# Altium PCB Layout.PcbDoc
Units mil, origin at the board's own origin, x right, y up, seen from the top; angles counter-clockwise.
Board outline 708.66 x 968 mil, 4 copper layers (Top Layer, Signal 1, Signal 2, Bottom Layer), stack 61.2 mil thick; 60 components, 41 nets, 144 pads, 96 vias.
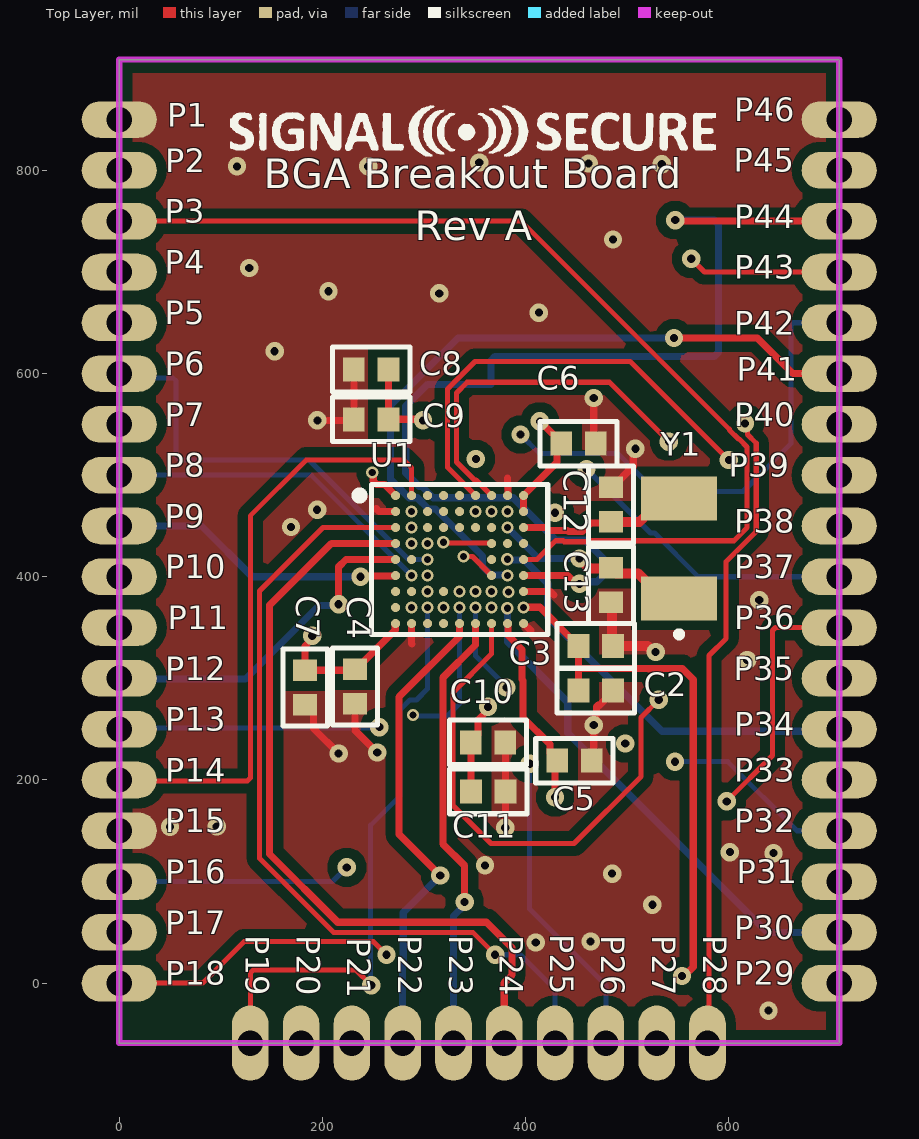
[diagram p0: Top Layer view]
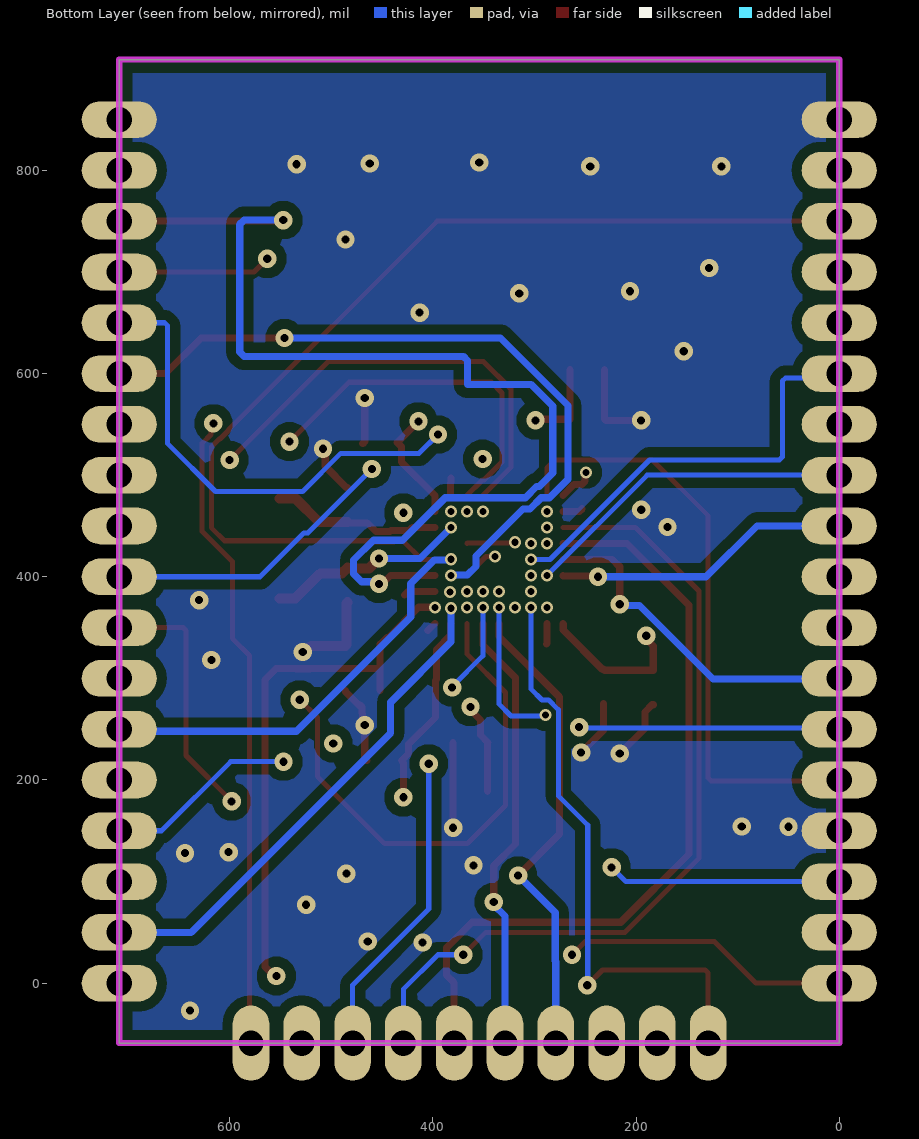
[diagram p1: Bottom Layer view, seen from below]
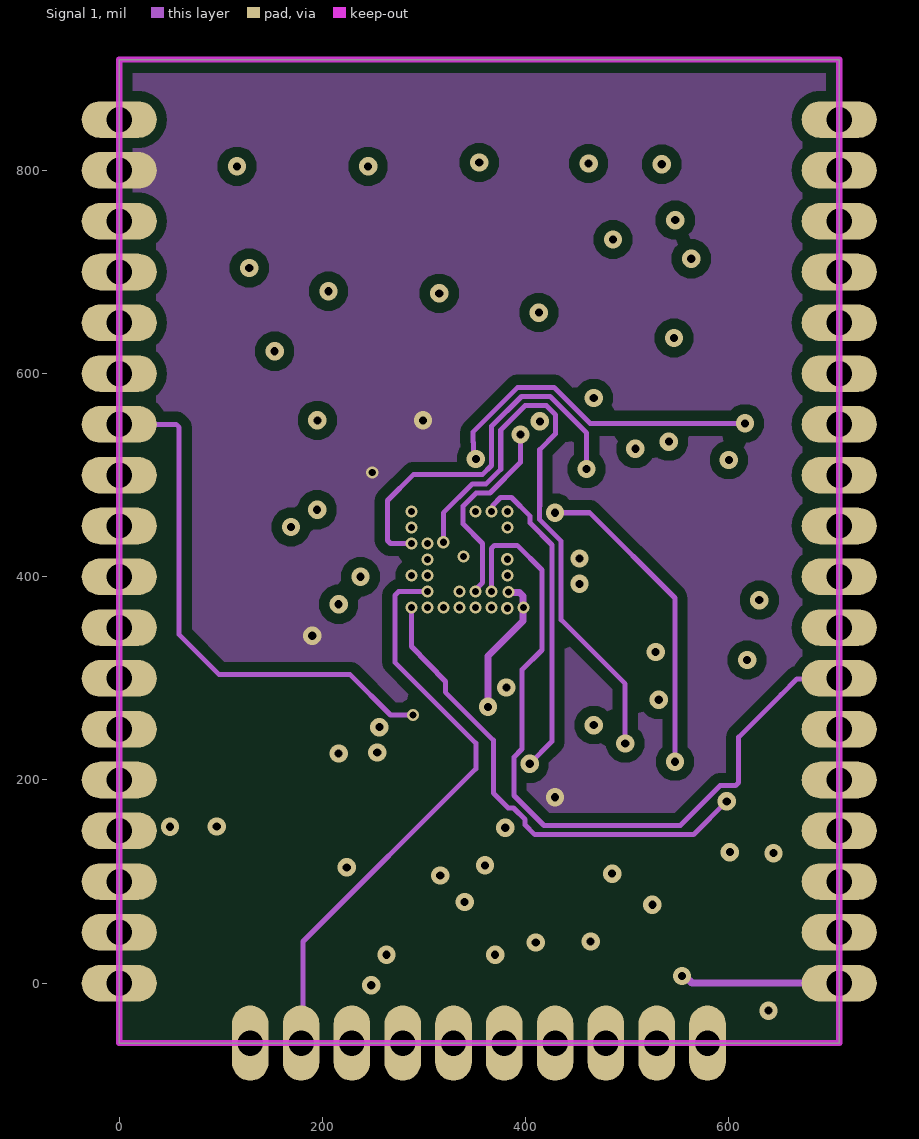
[diagram p2: Signal 1]
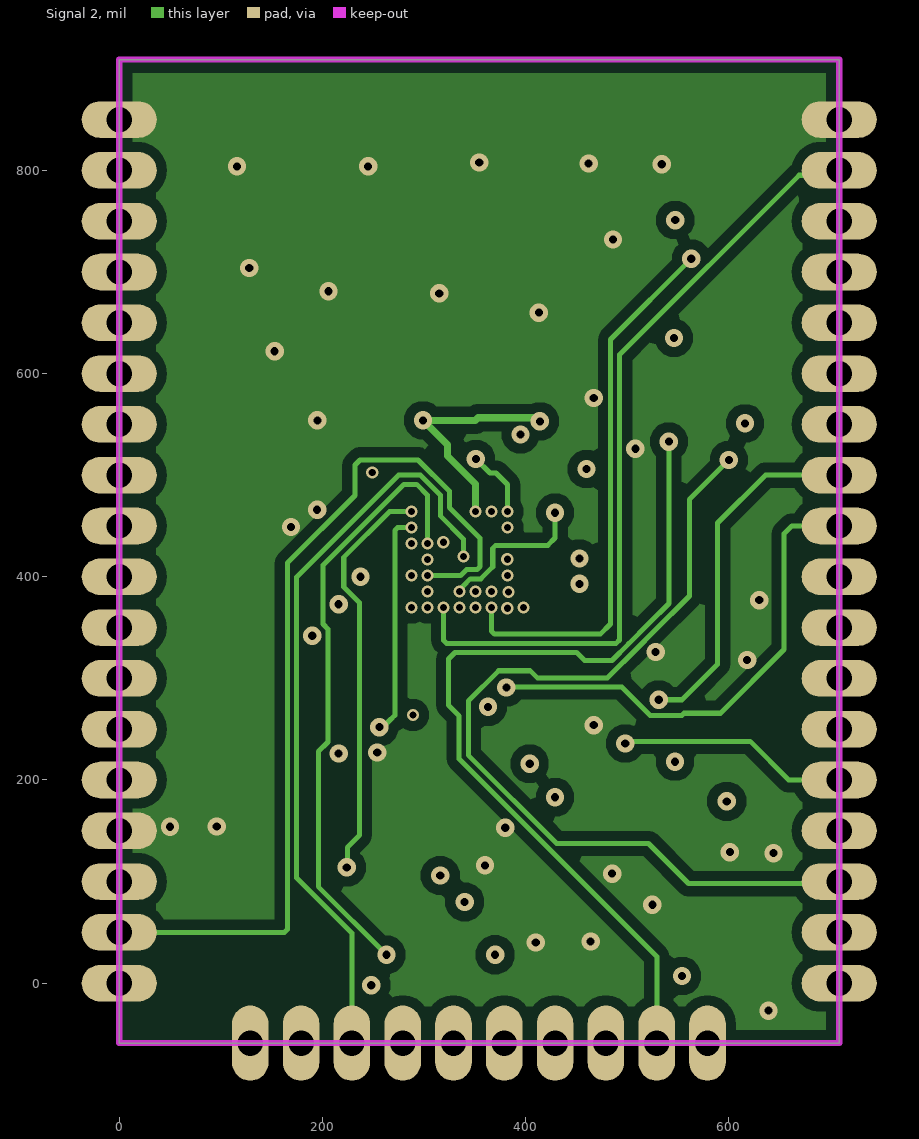
[diagram p3: Signal 2]

## Layer stack, top to bottom
Top Solder: solder mask 0.4, Solder Resist, Dk 3.5
Top Layer: signal copper 1.4
Dielectric 1: prepreg 2.8, PP-006, Dk 4.1
Signal 1: signal copper 1.4
Dielectric1: core 50, Core-044, Dk 4.28
Signal 2: signal copper 1.4
Dielectric 2: prepreg 2.8, PP-006, Dk 4.1
Bottom Layer: signal copper 1.4
Bottom Solder: solder mask 0.4, Solder Resist, Dk 3.5

## Board outline
0,-59 708.66,-59 708.66,909 0,909

## Design rules (kind name [scope] priority, off if disabled: settings)
AcuteAngle [All] p1 off: minimum=6.00000000000000E+0001 checktracksonly=FALSE
AssemblyTestPointUsage [All] p1 off:
AssemblyTestpoint [All] p1 off: testpointundercomponent=TRUE minsize=40 maxsize=100 preferedsize=60 minholesize=0 maxholesize=40 preferedholesize=32 testpointgrid=1 usegrid=TRUE gridtolerance=0.01 allowsidetop=TRUE allowsidebottom=TRUE
Clearance Clearance_Keepout [OnLayer('Keep-Out Layer')] p1: gap=4 ignorepadtopadclearanceinfootprint=FALSE except(0: Track-Track Track-SMDPad Track-THPad Track-Hole; 2: Via-Via; 10: Arc-Poly Arc-Region Track-Poly Track-Region SMDPad-Poly SMDPad-Region THPad-Poly THPad-Region Via-Poly Via-Region Fill-Poly Fill-Region Poly-Poly Poly-Region Poly-Text Poly-Hole Region-Region)
Clearance [All] p2: gap=4 ignorepadtopadclearanceinfootprint=FALSE except(3: Track-Fill; 3.5: THPad-Via Via-Via; 10: Arc-Poly Track-Poly SMDPad-Poly THPad-Poly Via-Poly Fill-Poly Poly-Poly Poly-Text Poly-Hole)
ComponentClearance [All] p1: gap=1 collisioncheckmode=3 verticalgap=10 showdistances=FALSE
DiffPairsRouting [All] p1: maxlimit=5 minlimit=5 mostfreqgap=5 toplayer_minwidth=15 toplayer_maxwidth=18.74 toplayer_prefwidth=15 midlayer1_minwidth=15 midlayer1_maxwidth=15 midlayer1_prefwidth=15 midlayer2_minwidth=15 midlayer2_maxwidth=15 midlayer2_prefwidth=15 bottomlayer_minwidth=15 bottomlayer_maxwidth=18.74 bottomlayer_prefwidth=15 maxuncoupledlength=100
FabricationTestPointUsage [All] p1 off: valid=0 allowmultiple=FALSE
FabricationTestPointUsage TestPointUsage [All] p2 off: valid=0 allowmultiple=FALSE
FabricationTestpoint [All] p1 off: side=3 testpointundercomponent=TRUE minsize=40 maxsize=100 preferedsize=60 minholesize=0 maxholesize=40 preferedholesize=32 testpointgrid=1 allowsidetop=TRUE allowsidebottom=TRUE usegrid=TRUE gridtolerance=0.01
FabricationTestpoint Testpoint [All] p2 off: side=3 testpointundercomponent=TRUE minsize=40 maxsize=100 preferedsize=60 minholesize=0 maxholesize=40 preferedholesize=32 testpointgrid=1 allowsidetop=TRUE allowsidebottom=TRUE usegrid=TRUE gridtolerance=0.01
FanoutControl Fanout_LCC [IsLCC] p1 off: bgadir=Out bgaviamode=Centered fanoutstyle=Auto fanoutdirection=Alternating viagrid=1 // Fanout_LCC (Default Rule)
FanoutControl Fanout_BGA [IsBGA] p2 off: bgadir=Out bgaviamode=Centered fanoutstyle=Auto fanoutdirection=Alternating viagrid=1 // Fanout_BGA (Default Rule)
FanoutControl Fanout_Small [(CompPinCount < 5)] p3 off: bgadir=Out bgaviamode=Centered fanoutstyle=Auto fanoutdirection=OutThenIn viagrid=1 // Fanout_Small (Default Rule)
FanoutControl Fanout_SOIC [IsSOIC] p4 off: bgadir=Out bgaviamode=Centered fanoutstyle=Auto fanoutdirection=Alternating viagrid=1 // Fanout_SOIC (Default Rule)
FanoutControl Fanout_Default [All] p5 off: bgadir=Out bgaviamode=Centered fanoutstyle=Auto fanoutdirection=Alternating viagrid=1 // Fanout_Default (Default Rule)
FanoutControl Fanout_BGA_1 [IsBGA] p6 off: bgadir=Out bgaviamode=Centered fanoutstyle=Auto fanoutdirection=Alternating viagrid=1 // Fanout_BGA (Default Rule)
FanoutControl Fanout_LCC_1 [IsLCC] p7 off: bgadir=Out bgaviamode=Centered fanoutstyle=Auto fanoutdirection=Alternating viagrid=1 // Fanout_LCC (Default Rule)
FanoutControl Fanout_SOIC_1 [IsSOIC] p8 off: bgadir=Out bgaviamode=Centered fanoutstyle=Auto fanoutdirection=Alternating viagrid=1 // Fanout_SOIC (Default Rule)
FanoutControl Fanout_Small_1 [(CompPinCount < 5)] p9 off: bgadir=Out bgaviamode=Centered fanoutstyle=Auto fanoutdirection=OutThenIn viagrid=1 // Fanout_Small (Default Rule)
FanoutControl Fanout_Default_1 [All] p10 off: bgadir=Out bgaviamode=Centered fanoutstyle=Auto fanoutdirection=Alternating viagrid=1 // Fanout_Default (Default Rule)
Height [OnLayer('Top Layer')] p1: minheight=0 maxheight=1000 prefheight=250
HoleSize [All] p1: absolutevalues=TRUE maxlimit=500 minlimit=7 maxpercent=80.000 minpercent=20.000
HoleToHoleClearance [All] p1: gap=5 allowstackedmicrovias=TRUE
LayerPairs [All] p1 off: enforce=TRUE
LayerPairs LayerPairs_1 [All] p2 off: enforce=TRUE
MinimumAnnularRing [All] p1: minimumring=2
MinimumSolderMaskSliver [All] p1 off: minsoldermaskwidth=4
NetAntennae [All] p1: netantennaetolerance=10
NetsToIgnore [InNetClass('PWR') or InNetClass('20MIL') or InNetClass('50MIL') or InNetClass('BDCOMDIFF-10W5G') or InNetClass('DIFF-5W5G') or InNetClass('DIFF-7.5W5G') or InNetClass('FE-CTRL-5W7SP') or InNetClass('FE-INPUT') or InNetClass('FRONTEND') or InNetClass('GND') or InNetClass('mem-add') or InNetClass('mem-data')] p1 off:
PlaneClearance [All] p1: clearance=10
PlaneConnect PlaneVia [IsVia] p1: planeconnectstyle=Direct reliefexpansion=20 reliefentries=4 reliefconductorwidth=10 reliefairgap=10
PlaneConnect [All] p2: planeconnectstyle=Direct reliefexpansion=8 reliefentries=4 reliefconductorwidth=15 reliefairgap=8
PolygonConnect PolygonConnect_VIA [IsVia] p1: connectstyle=Direct reliefconductorwidth=10 reliefentries=4 polygonreliefangle="90 Angle" airgapwidth=10
PolygonConnect [All] p2: connectstyle=Direct reliefconductorwidth=15 reliefentries=4 polygonreliefangle="90 Angle" airgapwidth=10
RoutingPriority [All] p1 off: routingpriority=0
RoutingTopology RoutingTopology_ADD [InNetClass('mem-add')] p1: topology=Shortest
RoutingTopology RoutingTopology_Data [InNetClass('mem-data')] p2: topology=Shortest
RoutingTopology [All] p3: topology=Shortest
RoutingVias [All] p1: holewidth=8 width=18 viastyle="Through Hole" minholewidth=7 minwidth=7 maxholewidth=30 maxwidth=50
SilkToSilkClearance [All] p1 off: silktosilkclearance=10
SilkToSolderMaskClearance SilkscreenOverComponentPads [IsPad] p1 off: minsilkscreentomaskgap=10 clearancetoexposedcopper=TRUE
SolderMaskExpansion [All] p1: expansion=3 istentingtop=FALSE
Width [All] p1: maxlimit=250 minlimit=5 preferedwidth=10 minimp=50.000000 maximp=50.000000 favimp=50.000000
7 further rules are at their usual default settings.

## Components (designator, comment, footprint, x,y, rotation, side; value= is the part's Value field where it differs from the comment)
C2 "GRM155R71H104KE14J" CAP_0402_0.55MM 469,289 r180 top value=0.1uF
C3 "GRM155R61E105MA12D" CAP_0402_0.55MM 469,331 r0 top value=1uF
C4 "GRM155R71H104KE14J" CAP_0402_0.55MM 233,291.99 r90 top value=0.1uF
C5 "GRM155R71H104KE14J" CAP_0402_0.55MM 448,220 r180 top value=0.1uF
C6 "GRM155R71H104KE14J" CAP_0402_0.55MM 452,532 r180 top value=0.1uF
C7 "CL05A475KP5NRNC" CAP_0402_0.55MM 182,291 r270 top value=4.7uF
C8 "GRM155R71H104KE14J" CAP_0402_0.55MM 248,603 r0 top value=0.1uF
C9 "CL05A475KP5NRNC" CAP_0402_0.55MM 248,556 r180 top value=4.7uF
C10 "GCM155R71H103KA55J" CAP_0402_0.55MM 363,236 r0 top value=10nF
C11 "GRM155R61E105MA12D" CAP_0402_0.55MM 363.23,187.78 r0 top value=1uF
C12 "885012005023" CAP_0402_0.55MM 485,471.01 r90 top value=4.7pF
C13 "885012005023" CAP_0402_0.55MM 483,391.99 r270 top value=4.7pF
P1 "1-PIN-HDR-GEN" 1X01-PIN 0,850 r180 top
P2 "1-PIN-HDR-GEN" 1X01-PIN 0,800 r180 top
P3 "1-PIN-HDR-GEN" 1X01-PIN 0,750 r180 top
P4 "1-PIN-HDR-GEN" 1X01-PIN 0,700 r180 top
P5 "1-PIN-HDR-GEN" 1X01-PIN 0,650 r180 top
P6 "1-PIN-HDR-GEN" 1X01-PIN 0,600 r180 top
P7 "1-PIN-HDR-GEN" 1X01-PIN 0,550 r180 top
P8 "1-PIN-HDR-GEN" 1X01-PIN 0,500 r180 top
P9 "1-PIN-HDR-GEN" 1X01-PIN 0,450 r180 top
P10 "1-PIN-HDR-GEN" 1X01-PIN 0,400 r180 top
P11 "1-PIN-HDR-GEN" 1X01-PIN 0,350 r180 top
P12 "1-PIN-HDR-GEN" 1X01-PIN 0,300 r180 top
P13 "1-PIN-HDR-GEN" 1X01-PIN 0,250 r180 top
P14 "1-PIN-HDR-GEN" 1X01-PIN 0,200 r180 top
P15 "1-PIN-HDR-GEN" 1X01-PIN 0,150 r180 top
P16 "1-PIN-HDR-GEN" 1X01-PIN 0,100 r180 top
P17 "1-PIN-HDR-GEN" 1X01-PIN 0,50 r180 top
P18 "1-PIN-HDR-GEN" 1X01-PIN 0,0 r180 top
P19 "1-PIN-HDR-GEN" 1X01-PIN 129,-59 r90 top
P20 "1-PIN-HDR-GEN" 1X01-PIN 179,-59 r90 top
P21 "1-PIN-HDR-GEN" 1X01-PIN 229,-59 r90 top
P22 "1-PIN-HDR-GEN" 1X01-PIN 279,-59 r90 top
P23 "1-PIN-HDR-GEN" 1X01-PIN 329,-59 r90 top
P24 "1-PIN-HDR-GEN" 1X01-PIN 379,-59 r90 top
P25 "1-PIN-HDR-GEN" 1X01-PIN 429,-59 r90 top
P26 "1-PIN-HDR-GEN" 1X01-PIN 479,-59 r90 top
P27 "1-PIN-HDR-GEN" 1X01-PIN 529,-59 r90 top
P28 "1-PIN-HDR-GEN" 1X01-PIN 579,-59 r90 top
P29 "1-PIN-HDR-GEN" 1X01-PIN 708.66,0 r180 top
P30 "1-PIN-HDR-GEN" 1X01-PIN 708.66,50 r180 top
P31 "1-PIN-HDR-GEN" 1X01-PIN 708.66,100 r180 top
P32 "1-PIN-HDR-GEN" 1X01-PIN 708.66,150 r180 top
P33 "1-PIN-HDR-GEN" 1X01-PIN 708.66,200 r180 top
P34 "1-PIN-HDR-GEN" 1X01-PIN 708.66,250 r180 top
P35 "1-PIN-HDR-GEN" 1X01-PIN 708.66,300 r180 top
P36 "1-PIN-HDR-GEN" 1X01-PIN 708.66,350 r180 top
P37 "1-PIN-HDR-GEN" 1X01-PIN 708.66,400 r180 top
P38 "1-PIN-HDR-GEN" 1X01-PIN 708.66,450 r180 top
P39 "1-PIN-HDR-GEN" 1X01-PIN 708.66,500 r180 top
P40 "1-PIN-HDR-GEN" 1X01-PIN 708.66,550 r180 top
P41 "1-PIN-HDR-GEN" 1X01-PIN 708.66,600 r180 top
P42 "1-PIN-HDR-GEN" 1X01-PIN 708.66,650 r180 top
P43 "1-PIN-HDR-GEN" 1X01-PIN 708.66,700 r180 top
P44 "1-PIN-HDR-GEN" 1X01-PIN 708.66,750 r180 top
P45 "1-PIN-HDR-GEN" 1X01-PIN 708.66,800 r180 top
P46 "1-PIN-HDR-GEN" 1X01-PIN 708.66,850 r180 top
U1 "STM32L476JGY6TR" BGA72C40P9X9_441X374X56 335,417 r0 top
Y1 "ECS-.327-6-34QN-TR" CRY_3.2X1.5_2SMD 551,428 r90 top value="32.768 kHz"

## Footprints (in the part's own frame and the unit in brackets; to place one, negate y for a bottom-side part, rotate by r counter-clockwise, add the part's x,y. Pads: shape width x height; smd on the part's side, far side on the other; paste and mask are expansions set on the pad)
1X01-PIN [mil]
  oval 74x36 hole 25: 1(0,0)
BGA72C40P9X9_441X374X56 [mm]
  round 0.225 smd mask+0: A1(-1.6,1.6) A2(-1.2,1.6) A3(-0.8,1.6) A4(-0.4,1.6) A5(0,1.6) A6(0.4,1.6) A7(0.8,1.6) A8(1.2,1.6) A9(1.6,1.6) B1(-1.6,1.2) B2(-1.2,1.2) B3(-0.8,1.2) B4(-0.4,1.2) B5(0,1.2) B6(0.4,1.2) B7(0.8,1.2) B8(1.2,1.2) B9(1.6,1.2) C1(-1.6,0.8) C2(-1.2,0.8) C3(-0.8,0.8) C4(-0.4,0.8) C5(0,0.8) C6(0.4,0.8) C7(0.8,0.8) C8(1.2,0.8) C9(1.6,0.8) D1(-1.6,0.4) D2(-1.2,0.4) D3(-0.8,0.4) D7(0.8,0.4) D8(1.2,0.4) D9(1.6,0.4) E1(-1.6,0) E2(-1.2,0) E3(-0.8,0) E7(0.8,0) E8(1.2,0) E9(1.6,0) F1(-1.6,-0.4) F2(-1.2,-0.4) F3(-0.8,-0.4) F7(0.8,-0.4) F8(1.2,-0.4) F9(1.6,-0.4) G1(-1.6,-0.8) G2(-1.2,-0.8) G3(-0.8,-0.8) G4(-0.4,-0.8) G5(0,-0.8) G6(0.4,-0.8) G7(0.8,-0.8) G8(1.2,-0.8) G9(1.6,-0.8) H1(-1.6,-1.2) H2(-1.2,-1.2) H3(-0.8,-1.2) H4(-0.4,-1.2) H5(0,-1.2) H6(0.4,-1.2) H7(0.8,-1.2) H8(1.2,-1.2) H9(1.6,-1.2) J1(-1.6,-1.6) J2(-1.2,-1.6) J3(-0.8,-1.6) J4(-0.4,-1.6) J5(0,-1.6) J6(0.4,-1.6) J7(0.8,-1.6) J8(1.2,-1.6) J9(1.6,-1.6)
  silkscreen extent -2.55,-1.88 2.2,1.88, body extent -2.2,-1.88 2.2,1.88, height 0.59
CAP_0402_0.55MM [mm]
  rect 0.54x0.6 smd: 1(-0.432,0.025) 2(0.432,0.025)
  silkscreen extent -0.97,-0.53 0.97,0.58, body extent -0.5,-0.25 0.5,0.3, height 0.5
CRY_3.2X1.5_2SMD [mm]
  rect 1.1x1.9 smd: 1(-1.25,0) 2(1.25,0)
  silkscreen extent -2.2,-0.05 -2.1,0.05, body extent -1.6,-0.75 1.6,0.75, height 0.9

## Part data
C2 C4 C5 C6 C8: library part CAP_0.1UF_50V_20%_0402, "CAP_0.1UF_50V_20%_0402", Manufacturer=Murata, Voltage Rating=50V, ComponentLink1Description=Datasheet, ComponentLink1URL=https://search.murata.co.jp/Ceramy/image/img/A01X/G101/ENG/GRM155R71E104ME14-01.pdf, Height=0.55MM, Manufacturer Part Number=GRM155R71H104KE14J
C3 C11: library part CAP_1UF_25V_20%_0402, "CAP_1UF_25V_20%_0402", Manufacturer=Murata, Package=0402, Voltage Rating=25V, Height=0.55MM, Manufacturer Part Number=GRM155R61E105MA12D
C7 C9: library part CAP_4.7UF_10V_X5R_0402, "CAP CER 4.7UF 10V X5R 0402", Manufacturer="Samsung Electro-Mechanics", Voltage Rating=10V, ComponentLink1Description=Datasheet, ComponentLink1URL=https://media.digikey.com/pdf/Data%20Sheets/Samsung%20PDFs/CL05A475KP5NRNC_Spec.pdf, Manufacturer Part Number=CL05A475KP5NRNC
C10: library part CAP_10NF_50V_10%_0402, "CAP_10NF_50V_10%_0402", Manufacturer=Murata, Package=0402, Voltage Rating=50V, ComponentLink1Description=Datasheet, ComponentLink1URL=https://search.murata.co.jp/Ceramy/image/img/A01X/G101/ENG/GCM155R71H103KA55-01.pdf, Height=0.55MM, Manufacturer Part Number=GCM155R71H103KA55J
C12 C13: library part CAP_4.7PF_16V_C0G_0402, "CAP_4.7PF_16V_C0G_0402", Manufacturer="Würth Elektronik", Voltage Rating=16V, ComponentLink1Description=Datasheet, ComponentLink1URL=https://www.we-online.com/katalog/datasheet/885012005023.pdf, Manufacturer Part Number=885012005023
P1 P2 P3 P4 P5 P6 P7 P8 P9 P10 P11 P12 P13 P14 P15 P16 P17 P18 P19 P20 P21 P22 P23 P24 P25 P26 P27 P28 P29 P30 P31 P32 P33 P34 P35 P36 P37 P38 P39 P40 P41 P42 P43 P44 P45 P46: "Generic through hole", Manufacturer=N/A, Manufacturer Part Number=DNP
U1: library part MCU_ARM_CM4_80MHZ_STM32L476JGY6TR, "ARM Microcontrollers - MCU Ultra-low-power FPU Arm Cortex-M4 MCU 80 MHz 1 Mbyte of Flash LCD, USB OTG, DFSD", Manufacturer=STMicroelectronics, ComponentLink1Description=Datasheet, ComponentLink1URL=https://www.st.com/content/ccc/resource/technical/document/datasheet/c5/ed/2f/60/aa/79/42/0b/DM00108832.pdf/files/DM00108832.pdf/jcr:content/translations/en.DM00108832.pdf, Manufacturer Part Number=STM32L476JGY6TR
Y1: library part CRY_32.768KHZ_70K_4PF_2SMD, "32.768 kHz ±20ppm Crystal 6pF 70 kOhms 2-SMD, No Lead", Manufacturer=ECS, ComponentLink1Description=Datasheet, ComponentLink1URL=https://www.mouser.de/ProductDetail/ECS/ECS-327-6-34QN-TR/?qs=%2FnKYMpMO73Pux8utSILL9w%3D%3D, Height=0.9mm, Manufacturer Part Number=ECS-.327-6-34QN-TR

## Via types
v1: diameter 18, hole 8, Top Layer to Bottom Layer, tented both sides, 66 vias
v2: diameter 12, hole 7, Top Layer to Bottom Layer, tented both sides, 30 vias

## Nets (pads, with @x,y where several pads share a name; then routed paths per layer and width w, separated by ;. In a path a pad name is that pad's centre, name@x,y a point inside that pad or via, vN(x,y) a via of type N, cw(c..) or ccw(c..) an arc to the next point about the centre after c; other vN are vias at no path point)
+3.3VDC: C4.2 C5.2 C6.2 C7.1 C8.2 C9.1 P2.1 U1.A1 U1.A9 U1.B6 U1.B9 U1.J1 U1.J8 | length 801.4
  Top Layer w7: v1(190,342) 190,339.02 183,332.02 C7.1 231.01,308.01 C4.2 233.18,309 271.65,347.47 271.65,353.65 U1.J1 ; v2(249.09,502.55) 250.05,501.6 250.05,494.15 253.19,491 261,491 U1.A1 ; C8.2 C9.1 298,555 v1(299,554) ; U1.J8 382.6,353.65 382.6,342.4 396.5,328.5 396.5,298.83 397.5,297.83 397.5,261.6 423.9,235.2 423.9,226.09 C5.2 429,217.01 v1(429,183) ; U1.B9 U1.A9 ; U1.A9@398.35,480.35 430.79,512.79 430.79,527.98 434.99,532.18 414.17,553 v1(414,553)
  Signal 2 w7: v1(299,554) v1@299.5,553.5 ; v2(350.75,464.24) 350.75,491.25 323.05,518.95 323.05,529.95 v1@299.5,553.5 ; v1(414,553) 411.02,553 407.52,556.5 353.16,556.5 350.66,554 300,554 v1@299.5,553.5
ANT_SW_V1: P19.1 U1.H3 | length 594.5
  Top Layer w5: P19.1 129,10.07 131.93,13 233,13 v1(248,-2)
  Bottom Layer w5: v1(248,-2) 247.5,-1.5 247.5,155.5 276.5,184.5 276.5,269.18 286,278.68 292.5,278.68 303.5,289.68 v2(303.5,369.76)
ANT_SW_V2: P20.1 U1.G3 | length 578.8
  Signal 1 w5: P20.1 180.93,-57.07 180.93,41 351,211.07 351,236.15 271.24,315.91 271.24,381.65 275.1,385.5 v2(303.5,385.5)
ANT_SW_V3: P21.1 U1.F7 | length 777.6
  Top Layer w5: v2(338.96,420.04) 347.7,420.04 U1.F7
  Signal 2 w5: P21.1 229,49.27 174.5,103.77 174.5,399.56 274.94,500 296.44,500 316.01,480.43 316.01,459.99 338.96,437.04 v2(338.96,420.04)
BLC_UART_CTS: P24.1 U1.D1 | length 767.8
  Top Layer w7: U1.D1 208.75,432.75 148,372 148,127 215,60 361.33,60 386.5,34.83 386.5,7.87 379,0.37 P24.1
BLC_UART_RTS: P25.1 U1.C1 | length 820.4
  Top Layer w5: U1.C1 200.5,448.5 138,386 138,122.86 210.86,50 348,50 v1(370,28)
  Bottom Layer w5: v1(370,28) 395,28 429,-6 P25.1
BLC_UART_RX: P27.1 U1.A7 | length 1196.4
  Top Layer w5: U1.A7 351.15,495.34 349.74,495.34 332,513.08 332,581 342.5,591.5 482.5,591.5 v1(541,533)
  Signal 2 w5: P27.1 P27.1@529.13,-58.87 ; P27.1@529.13,-33 529.13,26.16 334.6,220.69 334.6,263.08 324.07,273.61 324.07,319.07 330.5,325.5 450.21,325.5 458.16,317.55 484.9,317.55 501.5,334.15 521.25,353.9 541,373.65 v1(541,533)
BLC_UART_TX: P26.1 U1.B7 | length 621.9
  Signal 1 w5: v2(366.5,464.24) 367.84,465.58 367.84,470.47 375.37,478 386.17,478 404.5,459.67 404.5,452.85 426,431.35 426,238 v1(404,216)
  Bottom Layer w5: v1(404,216) 404,73 479,-2 P26.1
BOOT0: P33.1 U1.D7 | length 849.8
  Top Layer w5: v2(319,434) 319.63,433.37 365.87,433.37 U1.D7
  Signal 1 w5: v2(319,434) 319,462.9 347.6,491.5 361.15,491.5 375.5,505.85 375.5,544.42 399.58,568.5 420.42,568.5 429.5,559.42 429.5,540.65 413.92,525.07 413.92,469.84 413.5,469.42 413.5,456.58 435,435.08 435,357.65 498,294.65 v1(498,236)
  Signal 2 w5: v1(498,236) 500,238 621,238 659,200 P33.1
"BTC RESET": P28.1 U1.B8 | length 1031.3
  Top Layer w5: P28.1 580.5,-57.5 580.5,322.42 597.34,339.26 597.34,414.94 627,444.6 627,531.42 618.38,540.04 618.38,548.62 v1(616,551)
  Signal 1 w5: v1(351,516) 348.51,518.49 348.51,532.01 348,532.52 348,542.38 392.12,586.5 427.88,586.5 463.38,551 v1(616,551)
  Signal 2 w5: v1(351,516) 364.87,502.13 370.87,502.13 382.24,490.76 v2(382.24,464.24)
CLK: P38.1 U1.H6 | length 574.8
  Signal 2 w5: v1(381,291) 381.5,291.5 494.58,291.5 522.58,263.5 553.7,263.5 555.9,265.7 591.7,265.7 654.42,328.42 654.42,442.42 662,450 P38.1
  Bottom Layer w5: v2(350.75,369.76) 350.75,322.25 381,292 v1(381,291)
CS: P32.1 U1.G5 | length 656.1
  Signal 1 w5: v1(429,463) 463,463 547,379 v1(547,218)
  Signal 2 w5: v2(335,385.5) 335,387.4 338.25,390.65 345.57,398 355.83,398 367.62,409.79 367.62,428.01 370.55,430.94 421.78,430.94 429,438.16 v1(429,463)
  Bottom Layer w5: v1(547,218) 599,218 667,150 P32.1
EN_RF: P37.1 U1.D2 | length 668.5
  Signal 1 w5: v2(287.76,432.75) 266.9,432.75 263.97,435.68 263.97,475 289.47,500.5 357.42,500.5 366.5,509.58 366.5,548.15 395.85,577.5 424.15,577.5 460,541.65 v1(460,506)
  Bottom Layer w5: v1(460,506) 523,443 527,443 570,400 P37.1
ETC_1: P12.1 U1.E1 | length 342.5
  Top Layer w7: v1(216,373) 216,409.9 223.1,417 U1.E1
  Bottom Layer w7: P12.1 0.5,299.5 124.17,299.5 196.5,371.83 214.83,371.83 v1(216,373)
ETC_2: P8.1 U1.F2 | length 328.7
  Bottom Layer w5: P8.1 189.01,500 v2(287.76,401.25)
ETC_3: P9.1 U1.F1 | length 293.2
  Top Layer w7: v1(237.5,400) 238.4,400.9 271.65,400.9 U1.F1
  Bottom Layer w7: P9.1 81,450 131,400 v1(237.5,400)
GND: C2.1 C3.2 C4.1 C5.1 C6.1 C7.2 C8.1 C9.2 C10.2 C11.2 C12.2 C13.2 P1.1 P15.1 P46.1 U1.A8 U1.B1 U1.G9 U1.J2 U1.J9 | length 649.4
  Top Layer w7: C7.2 184.18,273.99 191.31,266.86 191.31,250.69 v1(216,226) ; v1(195,554) 229.99,554 C9.2 C8.1 ; C4.1 232,249 v1(254,227) ; 253,467 255.76,464.24 U1.B1 ; U1.J2 287.76,334.24 288,334 ; v1(380,153) 380,188.55 C11.2 380.24,236.77 C10.2 ; 382,497 382,493 382.6,492.4 382.6,480.35 U1.A8 ; U1.J9 405,347 ; U1.G9 424.5,385.5 428,382 ; C5.1 467,220.99 v1(467,254) 469.1,256.1 469.1,264.92 469.69,265.51 469.69,272.07 471.12,273.5 472.69,273.5 486.01,286.82 C2.1 ; v1(467,576) 467,533.01 C6.1 ; C12.2 485.18,488.02 505.9,508.73 505.9,523.9 v1(508,526)
  Top Layer w10: C13.2 485,373.98 485,333 C3.2 519.83,332 525.83,326 v1(527.99,326)
  other v1: 639,-27 410,40 464,41 524.7,77.15 485.12,107.79 360,116 644,128 601,129 50,154 96,154.14 618,318 630,377 169,449 194.8,465.94 153,622 413,660 315,679 206,681 128,704 486,732 116,804 245,804 534,806 354.33,807.68 462.02,806.82
IRQ_RF: P6.1 U1.E3 | length 423
  Bottom Layer w5: P6.1 4.49,595.51 53.07,595.51 56,592.58 56,517.93 58.93,515 186.74,515 284.74,417 v2(303.5,417)
JAMMING_CE: P36.1 U1.H2 | length 732.7
  Top Layer w5: v1(598,179) 643,224 643,347.07 645.93,350 P36.1
  Signal 1 w5: v2(287.76,369.76) 287.76,331.32 321,296.85 321,286.42 368.21,239.22 368.21,187.08 382.79,172.5 388.08,172.5 399.5,161.08 399.5,155.79 409.1,146.18 565.18,146.18 v1(598,179)
JAMMING_LE: P35.1 U1.G7 | length 755.1
  Signal 1 w5: v2(366.5,385.5) 366.5,428.01 369.43,430.94 391.63,430.94 416,406.57 416,328 396.5,308.5 396.5,230.42 388.5,222.42 388.5,184.81 418.12,155.18 552.26,155.18 591.58,194.5 606.73,194.5 609.66,197.43 609.66,242.14 651.53,284 667.09,299.57 708.23,299.57 P35.1
LINK_LED: P34.1 U1.E8 | length 417
  Bottom Layer w7: v2(381.99,417.26) 382.55,416.7 398.49,416.7 421.78,393.4 421.78,360.31 534.09,248 706.66,248 P34.1
MCU_LED: P30.1 U1.H8 | length 495.8
  Bottom Layer w7: v2(382,369) 382,336 441.5,276.5 441.5,246.34 637.84,50 P30.1
MISO: P7.1 U1.H5 | length 673.1
  Signal 1 w5: P7.1 56.07,550 59,547.07 59,343 98.33,303.67 227.33,303.67 267,264 v2(289,264)
  Bottom Layer w5: v2(289,264) 290,263 323,263 335,275 v2(335,369.76)
MOSI: P45.1 U1.H4 | length 780.2
  Signal 2 w5: v2(319.25,369.76) 319.25,337.43 322.18,334.5 489.12,334.5 492.5,337.88 492.5,618.5 669.22,795.22 703.88,795.22 P45.1
NetC12_1: C12.1 U1.C9 Y1.2 | length 168.2
  Top Layer w7: U1.C9 420.17,448.5 423.19,445.48 441.19,445.48 442.17,444.5 455.83,444.5 464.33,453 483,453 C12.1
  Top Layer w10: C12.1 512.04,454 535.25,477.21 Y1.2
NetC13_1: C13.1 U1.C8 Y1.1 | length 198.5
  Top Layer w10: v1(453,418) 463,408 483,408 C13.1 489.63,403.37 510.67,403.37 535.25,378.79 Y1.1
  Bottom Layer w7: v2(382.24,448.5) 412.74,418 v1(453,418)
NRST: P3.1 U1.E9 | length 1023.6
  Top Layer w5: P3.1 395.69,750 600.5,545.19 600.5,544.58 609.58,535.5 610.19,535.5 618,527.69 618,448.32 605.16,435.48 460.96,435.48 459.98,434.5 438.02,434.5 437.04,435.48 429.48,435.48 411,417 U1.E9
PA_SW_V1: P22.1 U1.J5 | length 469.8
  Top Layer w7: v1(316,106) 275.5,146.5 275.5,281.83 335,341.33 U1.J5
  Bottom Layer w7: P22.1 279,21.2 279.5,21.7 279.5,69.5 v1(316,106)
PA_SW_V2: P23.1 U1.J6 | length 439.5
  Top Layer w7: v1(340,80) 340,115.59 318.5,137.09 318.5,300.6 350.75,332.85 U1.J6@350.75,353.73
  Bottom Layer w7: P23.1 329,66.02 340,77.02 v1(340,80)
PWR_RQST: P39.1 U1.J7 | length 856.2
  Top Layer w5: U1.J7 366.5,324.17 328.5,286.18 328.5,174.87 365.87,137.5 447.73,137.5 513.5,203.27 513.5,261.5 v1(531,279)
  Signal 2 w5: v1(531,279) 554,279 588.92,313.92 588.92,452.92 636,500 P39.1
RF_LED: P18.1 U1.D3 | length 890.4
  Top Layer w5: P18.1 82,0 123,41 250,41 v1(263,28)
  Signal 2 w5: v1(263,28) 196,95 196,227.92 205.5,237.42 205.5,348.42 200.5,353.42 200.5,411.33 280.17,491 292.71,491 303.5,480.21 v2(303.5,432.75)
SCL: P44.1 U1.F9 | length 1050.5
  Top Layer w7: U1.F9 441.77,401.25 450.02,393 v1(453,393) ; v1(547.24,751) 548.24,750 P44.1@685,750
  Bottom Layer w7: v1(453,393) 455.1,395.1 470.1,395.1 477.93,402.93 477.93,416.4 458.33,436 430,436 398,468 397.58,468 387.84,477.74 308.9,477.74 297.9,488.74 295.26,488.74 282,502 282,568 303.42,589.42 366,589.42 366,612.9 370.1,617 585.9,617 590,621.1 590,746.9 585.9,751 v1(547.24,751)
SDA: P41.1 U1.F8 | length 716.8
  Top Layer w7: v1(546,635) 628,635 663,600 P41.1
  Bottom Layer w7: v2(382.24,401.25) 381.87,401.63 366.12,401.63 357.5,410.25 357.5,420.6 311.35,466.74 304.35,466.74 293.35,477.74 285.26,477.74 267,496 267,568.56 333.44,635 v1(546,635)
SWCLK: P16.1 U1.B2 | length 632
  Signal 2 w5: v1(224,114) 224.49,114.49 224.49,133.65 236.5,145.66 236.5,374.42 221,389.92 221,419.1 266.14,464.24 v2(287.76,464.24)
  Bottom Layer w5: P16.1 210,100 v1(224,114)
SWDIO: P13.1 U1.C2 | length 476.6
  Signal 2 w5: v1(256,252) 259.52,252 267.61,260.09 267.71,260.09 271.24,263.63 271.24,445.57 274.17,448.5 v2(287.76,448.5)
  Bottom Layer w5: P13.1 1,251 255,251 v1(256,252)
SWO: P31.1 U1.A6 | length 1332.4
  Top Layer w5: U1.A6 323,507.74 323,584.73 350.27,612 503,612 v1(600,515)
  Signal 2 w5: v1(600,515) 561.25,476.25 561.25,381.17 524.98,344.9 510.5,330.43 480.58,300.5 411.48,300.5 404.48,307.5 373.47,307.5 343.6,277.63 343.6,224.41 430.51,137.5 520.9,137.5 560.4,98 706.66,98 P31.1
TAG_LED: P17.1 U1.F3 | length 901
  Signal 2 w5: P17.1 162.57,50 165.5,52.93 165.5,413.5 232,480 232,510 237.05,515.05 294.12,515.05 325.01,484.16 325.01,467.99 355.03,437.97 355.03,409.93 352.1,407 341.84,407 336.09,401.25 v2(303.5,401.25)
TDI: P14.1 U1.A2 | length 600.7
  Top Layer w5: P14.1 1,199 126.07,199 129,201.93 129,460 184.05,515.05 279.95,515.05 287.76,507.24 U1.A2
USB_UART_RX: P42.1 U1.G6 | length 670.3
  Signal 1 w5: v2(350.75,385.5) 350.75,387.4 354,390.65 357.5,394.18 357.5,432.84 338.25,452.09 338.25,469.42 351.33,482.5 364.88,482.5 395,512.62 v1(395,540)
  Bottom Layer w5: v1(395,540) 413.5,521.5 490.58,521.5 528.08,484 614,484 661,531 661,647.07 663.93,650 P42.1
USB_UART_TX: P43.1 U1.H7 | length 689.2
  Top Layer w5: v1(563,713) 576,700 P43.1
  Signal 2 w5: v2(366.5,369.76) 366.5,346.43 369.43,343.5 473.51,343.5 483.5,353.49 483.5,633.5 v1(563,713)
VDDA: C2.2 C3.1 C10.1 C11.1 P29.1 U1.G8 U1.H9 | length 893.2
  Top Layer w7: C11.1 346.22,236.77 C10.1 353.12,244.13 353.12,259.15 363,269.02 v1(363,272) ; U1.H9@400,370 414,370 443.69,340.31 444.87,340.31 C3.1@450.09,335.09 ; C2.2 451.99,309.81 ; C3.1@451.99,333.99 C3.1 451.99,309.81 ; v1(554,7) 556,7 565,16 565,299 554.19,309.81 535.14,309.81 534.83,309.5 521.16,309.5 520.85,309.81 451.99,309.81
  Signal 1 w7: v1(363,272) 363,322 397.42,356.42 397.42,369.18 v2(397.99,369.76) 397.42,370.33 397.42,381.15 393.89,384.67 383.33,384.67 v2(383,385) ; v1(554,7) 556.98,7 563.98,0 P29.1@688,0
pads on no net: P4.1 P5.1 P10.1 P11.1 P40.1 U1.A3 U1.A4 U1.A5 U1.B3 U1.B4 U1.B5 U1.C3 U1.C4 U1.C5 U1.C6 U1.C7 U1.D8 U1.D9 U1.E2 U1.E7 U1.G1 U1.G2 U1.G4 U1.H1 U1.J3 U1.J4

## Polygon pours and split planes (outlines as drawn)
GND on Bottom Layer "GND_L04_P000" (solid, remove dead copper, pour order 0): 0,-59 0,909 708.66,909 708.66,-59
+3.3VDC on Signal 1 "+3.3VDC_L02_P001" (solid, remove dead copper, pour order 1): 0,-59 0,909 708.66,909 708.66,-59
GND on Top Layer "CSS" (solid, remove dead copper, pour order 2): 0,-59 0,909 708.66,909 708.66,-59
GND on Signal 2 "GND_L03_P003" (solid, remove dead copper, pour order 3): 0,-59 0,909 708.66,909 708.66,-59

## Keep-outs
Keep-Out Layer:
  the board outline again, w6

## Silkscreen, mask and mechanical layers (free items; w line width, h text height)
Top Overlay:
  drawing of 19 lines, arcs and shapes, not listed
  text "BGA Breakout Board" at 142,772.55 h50
  text "Rev A" at 291,721.51 h50
Top Assembly:
  text "(ASSY) SHEET 1 OF 2" at 10827.54,-5003.24 h100
M4-PCB Outline:
  the board outline again, w6
Mechanical 7:
  circle w6: c-25.2,891.34 r13.92
Bottom Assembly:
  lines w5: -7610.96,-1413.74 -7310.96,-1413.74 ; -7610.96,2336.26 -7310.96,2336.26 ; -7610.96,6086.26 -7310.96,6086.26 ; -7310.96,-4563.74 -4310.96,-4563.74 ; -7310.96,-4263.74 -4310.96,-4263.74 ; -6410.96,-4863.74 -6410.96,-4263.74 ; -4310.96,-4863.74 -4310.96,-4263.74 ; -4310.96,-4638.74 -2585.96,-4638.74 ; -4310.96,-4413.74 -2585.96,-4413.74 ; -4310.96,-4163.74 -2585.96,-4163.74 ; -4310.96,-3888.74 -2585.96,-3888.74 ; -4275.96,-5163.74 -4275.96,-4863.74 ; -4275.96,9536.26 -4275.96,9836.26 ; -2810.96,-4863.74 -1410.96,-4863.74 ; -940.96,-5163.74 -940.96,-4863.74 ; -940.96,9536.26 -940.96,9836.26 ; 2389.04,-5163.74 2389.04,-4863.74 ; 2389.04,9536.26 2389.04,9836.26 ; 5724.04,-5163.74 5724.04,-4863.74 ; 5724.04,9536.26 5724.04,9836.26 ; 9054.04,-5163.74 9054.04,-4863.74 ; 9054.04,9536.26 9054.04,9836.26 ; 12089.04,-1413.74 12389.04,-1413.74 ; 12089.04,2336.26 12389.04,2336.26 ; 12089.04,6086.26 12389.04,6086.26 ; -7310.96,-4863.74 12089.04,-4863.74 12089.04,9536.26 -7310.96,9536.26 -7310.96,-4863.74 ; -7310.96,-4863.74 -2585.96,-4863.74 -2585.96,-3663.74 -4310.96,-3663.74 ; -7310.96,-4863.74 -7310.96,-3663.74 -4310.96,-3663.74 ; -4310.96,-4263.74 -4310.96,-3663.74 ; -7610.96,-5163.74 12389.04,-5163.74 12389.04,9836.26 -7610.96,9836.26 -7610.96,-5163.74
  text "2" at 7415.54,9623.76 h125
  text "5" at -2584.46,9620.76 h125
  text "4" at 747.04,9620.76 h125
  text "3" at 4082.04,9620.76 h125
  text "1" at 10737.7,9617.26 h125
  text "6" at -5909.46,9610.76 h125
  text "A" at -7410.46,7873.26 h125
  text "A" at 12279.54,7870.26 h125
  text "B" at 12289.04,4126.76 h125
  text "B" at -7407.46,4123.26 h125
  text "C" at -7406.96,373.26 h125
  text "C" at 12283.04,373.26 h125
  text "D" at -7410.46,-3376.74 h125
  text "D" at 12279.54,-3376.74 h125
  text "DATE:" at -3574.46,-3755.24 h75
  text "ENGINEER:" at -2614.96,-3755.24 h75
  text "TITLE:" at -4368.46,-3845.24 h125
  text "SEE SHEET 1" at -4866.84,-3852.74 h125
  text "SEE SHEET 1" at -2612.46,-3859.24 h75
  text "SEE SHEET 1" at -3636.27,-3861.42 h75
  text "DATE:" at -3574.46,-3980.24 h75
  text "PCB DESIGNER:" at -2614.96,-3980.24 h75
  text "SEE SHEET 1" at -2607.46,-4109.24 h75
  text "SEE SHEET 1" at -3626.27,-4110.42 h75
  text ".Plot_File_Name" at -4410.96,-4213.74 h125
  text "ISSUED BY:" at -2613.46,-4264.74 h75
  text "DATE:" at -3574.96,-4267.24 h75
  text "SEE SHEET 1" at -2622.46,-4374.24 h75
  text "SEE SHEET 1" at -3615.27,-4382.42 h75
  text "REV:" at -6451.96,-4396.74 h100
  text "Drawing Size: C" at -4696.96,-4472.24 h125
  text "FILE NAME:" at -2615.46,-4508.74 h70
  text "SEE SHEET 1" at -6476.46,-4519.24 h80
  text "SEE SHEET 1" at -2608.96,-4615.24 h70
  text "PRINTED:" at -2611.96,-4730.24 h70
  text "SCALE: N/A" at -6453.96,-4761.74 h100
  text "SEE SHEET 1" at -4541.46,-4777.24 h125
  text ".PRINT_DATE" at -2609.46,-4836.74 h70
  text "(ASSY) SHEET 2 OF 2" at -6064.96,-5009.74 h90
  text "6" at -5912.96,-5048.74 h125
  text "5" at -2577.96,-5048.74 h125
  text "4" at 747.04,-5048.74 h125
  text "3" at 4082.04,-5048.74 h125
  text "2" at 7412.04,-5048.74 h125
  text "1" at 10737.7,-5048.74 h125
M16_SheetSym:
  lines w5: -7600.96,-1403.74 -7300.96,-1403.74 ; -7600.96,2346.26 -7300.96,2346.26 ; -7600.96,6096.26 -7300.96,6096.26 ; -4265.96,-5153.74 -4265.96,-4853.74 ; -4265.96,9546.26 -4265.96,9846.26 ; -935.96,-5153.74 -935.96,-4853.74 ; -935.96,9546.26 -935.96,9846.26 ; 2399.04,-5153.74 2399.04,-4853.74 ; 2399.04,9546.26 2399.04,9846.26 ; 5729.04,-5153.74 5729.04,-4853.74 ; 5729.04,8446.26 12099.04,8446.26 ; 5729.04,8746.26 12099.04,8746.26 ; 5729.04,9046.26 12099.04,9046.26 ; 5729.04,9246.26 12099.04,9246.26 ; 5729.04,9846.26 5729.04,9546.26 5729.04,8146.26 12099.04,8146.26 ; 6199.04,-4853.74 7599.04,-4853.74 ; 6229.04,8146.26 6229.04,9546.26 ; 6929.04,8146.26 6929.04,9546.26 ; 7374.04,-4628.74 9099.04,-4628.74 ; 7374.04,-4403.74 9099.04,-4403.74 ; 7374.04,-4153.74 9099.04,-4153.74 ; 7374.04,-3878.74 9099.04,-3878.74 ; 9064.04,-5153.74 9064.04,-4853.74 ; 9064.04,9546.26 9064.04,9846.26 ; 9099.04,-4853.74 9099.04,-4253.74 ; 9099.04,-4553.74 12099.04,-4553.74 ; 9905.04,8146.26 9905.04,9543.76 ; 11129.04,8146.26 11129.04,9546.26 ; 11199.04,-4853.74 11199.04,-4253.74 ; 12099.04,-4253.74 9099.04,-4253.74 ; 12099.04,-1403.74 12399.04,-1403.74 ; 12099.04,2346.26 12399.04,2346.26 ; 12099.04,6096.26 12399.04,6096.26 ; 9099.04,-4253.74 9099.04,-3653.74 ; 9099.04,-3653.74 12099.04,-3653.74 12099.04,-4853.74 ; 9099.04,-3653.74 7374.04,-3653.74 7374.04,-4853.74 12099.04,-4853.74 ; 12099.04,-4853.74 -7300.96,-4853.74 -7300.96,9546.26 12099.04,9546.26 12099.04,-4853.74 ; -7600.96,-5153.74 -7600.96,9846.26 12399.04,9846.26 12399.04,-5153.74 -7600.96,-5153.74
  text "1" at -5949.62,9661.26 h125
  text "2" at -2623.96,9661.26 h125
  text "3" at 706.04,9661.26 h125
  text "4" at 4041.04,9661.26 h125
  text "5" at 7366.04,9661.26 h125
  text "6" at 10701.04,9661.26 h125
  text "REVISIONS" at 8342.54,9332.76 h125
  text "APPROVED" at 11183.54,9089.26 h125
  text "ZONE" at 5761.54,9088.76 h125
  text "LETTER" at 6294.54,9088.76 h125
  text "DESCRIPTION" at 6972.54,9088.26 h125
  text "DATE" at 10306.54,9088.76 h125
  text "INITIAL PROTOTYPE" at 7024.04,8846.26 h125
  text "A0" at 6493,8837 h125
  text "NA" at 5894.04,8836.26 h125
  text "PDC" at 11460.16,8836.26 h125
  text "06/09/2022" at 9958,8833 h115
  text "A" at -7470.96,7883.26 h125
  text "A" at 12229.04,7883.26 h125
  text "B" at -7470.96,4133.26 h125
  text "B" at 12229.04,4133.26 h125
  text "C" at -7470.96,383.26 h125
  text "C" at 12229.04,383.26 h125
  text "template rev: 2.4" at 12159.04,-1353.74 h40 r90
  text "D" at -7470.96,-3366.74 h125
  text "D" at 12229.04,-3366.74 h125
  text "DATE:" at 8399.04,-3745.24 h75
  text "ENGINEER:" at 7397.04,-3750.74 h75
  text "BGA Breakout Board" at 9693.54,-3827.24 h125
  text "TITLE:" at 9155.04,-3834.24 h125
  text "05/05/2022" at 8393.17,-3843.01 h75
  text "Patrick Carberry" at 7443.17,-3844.01 h75
  text "DATE:" at 8399.04,-3970.24 h75
  text "PCB DESIGNER:" at 7394.04,-3975.24 h75
  text "Patrick Carberry" at 7443.17,-4093.01 h75
  text "05/05/2022" at 8396.17,-4100.01 h75
  text ".Plot_File_Name" at 9253.04,-4103.74 h125
  text "DATE:" at 8399.04,-4245.24 h75
  text "ISSUED BY:" at 7397.04,-4252.24 h75
  text "Patrick Carberry" at 7429.67,-4360.51 h75
  text "05/05/2022" at 8382.67,-4367.51 h75
  text "Drawing Size: C" at 9153.04,-4463.24 h125
  text "REV:" at 11263.04,-4466.74 h125
  text "A0" at 11729.33,-4472.09 h125
  text "FILE NAME:" at 7399.04,-4478.74 h60
  text ".PCB_FILE_NAME_NO_PATH" at 7400.54,-4590.24 h75
  text "PRINTED:" at 7399.04,-4703.74 h60
  text "SCALE: N/A" at 11239.04,-4747.74 h100
  text ".PRINT_DATE" at 7399.04,-4811.74 h75
  text "1" at -5949.62,-5038.74 h125
  text "2" at -2623.96,-5038.74 h125
  text "3" at 706.04,-5038.74 h125
  text "4" at 4041.04,-5038.74 h125
  text "5" at 7366.04,-5038.74 h125
  text "6" at 10701.04,-5038.74 h125
Drill Drawing:
  circle w10: c2372.39,284.27 r33.33
  lines w10: 2339.05,100.94 2405.72,100.94 2405.72,167.61 2339.05,167.61 2339.05,100.94 ; 2339.05,467.61 2405.72,467.61 2372.39,400.94 2339.05,467.61
  lines w15: 2279.26,55.94 5660.39,55.94 ; 2279.26,505.94 5660.39,505.94 ; 2311.07,943.58 2720.99,943.58 3650.73,943.58 4510.5,943.58 5160.33,943.58 5730.19,943.58 ; 2311.07,1063.58 2720.99,1063.58 3650.73,1063.58 4510.5,1063.58 5160.33,1063.58 5730.19,1063.58 ; 2311.07,1183.58 2720.99,1183.58 3650.73,1183.58 4510.5,1183.58 5160.33,1183.58 5730.19,1183.58 ; 2311.07,1303.58 2720.99,1303.58 3650.73,1303.58 4510.5,1303.58 5160.33,1303.58 5730.19,1303.58 ; 2311.07,1423.58 2720.99,1423.58 3650.73,1423.58 4510.5,1423.58 5160.33,1423.58 5730.19,1423.58 ; 2311.07,1543.58 2720.99,1543.58 3650.73,1543.58 4510.5,1543.58 5160.33,1543.58 5730.19,1543.58 ; 2311.07,1663.58 2720.99,1663.58 3650.73,1663.58 4510.5,1663.58 5160.33,1663.58 5730.19,1663.58 ; 2311.07,1783.58 2720.99,1783.58 3650.73,1783.58 4510.5,1783.58 5160.33,1783.58 5730.19,1783.58 ; 2311.07,1903.58 2720.99,1903.58 3650.73,1903.58 4510.5,1903.58 5160.33,1903.58 5730.19,1903.58 ; 2311.07,2023.58 2720.99,2023.58 3650.73,2023.58 4510.5,2023.58 5160.33,2023.58 5730.19,2023.58 ; 2311.07,2143.58 5730.19,2143.58 ; 2720.99,2263.58 2720.99,823.58 ; 2830.14,-94.06 2830.14,655.94 ; 3419.98,-94.06 3419.98,655.94 ; 3650.73,2263.58 3650.73,823.58 ; 4510.5,2263.58 4510.5,823.58 ; 4519.66,-94.06 4519.66,655.94 ; 5109.51,-94.06 5109.51,655.94 ; 5160.33,2263.58 5160.33,823.58 ; 2720.99,823.58 2311.07,823.58 2311.07,2263.58 5730.19,2263.58 5730.19,823.58 5160.33,823.58 ; 2720.99,823.58 3650.73,823.58 ; 3650.73,823.58 4510.5,823.58 ; 4510.5,823.58 5160.33,823.58 ; 2279.26,-94.06 5660.39,-94.06 5660.39,655.94 2279.26,655.94 2279.26,-94.06
  text "Layer" at 2381.07,2173.58 h60
  text "Name" at 2790.99,2173.58 h60
  text "Material" at 3720.73,2173.58 h60
  text "Thickness" at 4580.5,2173.58 h60
  text "Constant" at 5230.33,2173.58 h60
  text "Top Overlay" at 2790.99,2053.58 h60
  text "Top Solder" at 2790.99,1933.58 h60
  text "Solder Resist" at 3720.73,1933.58 h60
  text "0.40mil" at 4580.5,1933.58 h60
  text "3.5" at 5230.33,1933.58 h60
  text "1" at 2381.07,1813.58 h60
  text "Top Layer" at 2790.99,1813.58 h60
  text "1.40mil" at 4580.5,1813.58 h60
  text "Dielectric 1" at 2790.99,1693.58 h60
  text "PP-006" at 3720.73,1693.58 h60
  text "2.80mil" at 4580.5,1693.58 h60
  text "4.1" at 5230.33,1693.58 h60
  text "2" at 2381.07,1573.58 h60
  text "Signal 1" at 2790.99,1573.58 h60
  text "1.40mil" at 4580.5,1573.58 h60
  text "Dielectric1" at 2790.99,1453.58 h60
  text "Core-044" at 3720.73,1453.58 h60
  text "50.00mil" at 4580.5,1453.58 h60
  text "4.28" at 5230.33,1453.58 h60
  text "3" at 2381.07,1333.58 h60
  text "Signal 2" at 2790.99,1333.58 h60
  text "1.40mil" at 4580.5,1333.58 h60
  text "Dielectric 2" at 2790.99,1213.58 h60
  text "PP-006" at 3720.73,1213.58 h60
  text "2.80mil" at 4580.5,1213.58 h60
  text "4.1" at 5230.33,1213.58 h60
  text "4" at 2381.07,1093.58 h60
  text "Bottom Layer" at 2790.99,1093.58 h60
  text "1.40mil" at 4580.5,1093.58 h60
  text "Bottom Solder" at 2790.99,973.58 h60
  text "Solder Resist" at 3720.73,973.58 h60
  text "0.40mil" at 4580.5,973.58 h60
  text "3.5" at 5230.33,973.58 h60
  text "Bottom Overlay" at 2790.99,853.58 h60
  text "Symbol" at 2369.26,550.94 h72
  text "Count" at 2875.14,550.94 h72
  text "Hole Size" at 3464.98,550.94 h72
  text "Via/Pad" at 4564.66,550.94 h72
  text "Plated" at 5154.51,550.94 h72
  text "30" at 2875.14,400.94 h60
  text "7.00mil (0.178mm)" at 3464.98,400.94 h60
  text "Via" at 4564.66,400.94 h60
  text "PTH" at 5154.51,400.94 h60
  text "66" at 2875.14,250.94 h60
  text "8.00mil (0.203mm)" at 3464.98,250.94 h60
  text "Via" at 4564.66,250.94 h60
  text "PTH" at 5154.51,250.94 h60
  text "46" at 2875.14,100.94 h60
  text "25.00mil (0.635mm)" at 3464.98,100.94 h60
  text "Pad" at 4564.66,100.94 h60
  text "PTH" at 5154.51,100.94 h60
  text "142 Total" at 2875.14,-49.06 h60